# Altium PCB MK2.PcbDoc (part 7 of 7)
Units mil, origin at the board's own origin, x right, y up, seen from the top; angles counter-clockwise.
Board outline 3950 x 3965 mil, 2 copper layers (Top Layer, Bottom Layer); 19 components, 37 nets, 113 pads, 8 vias.
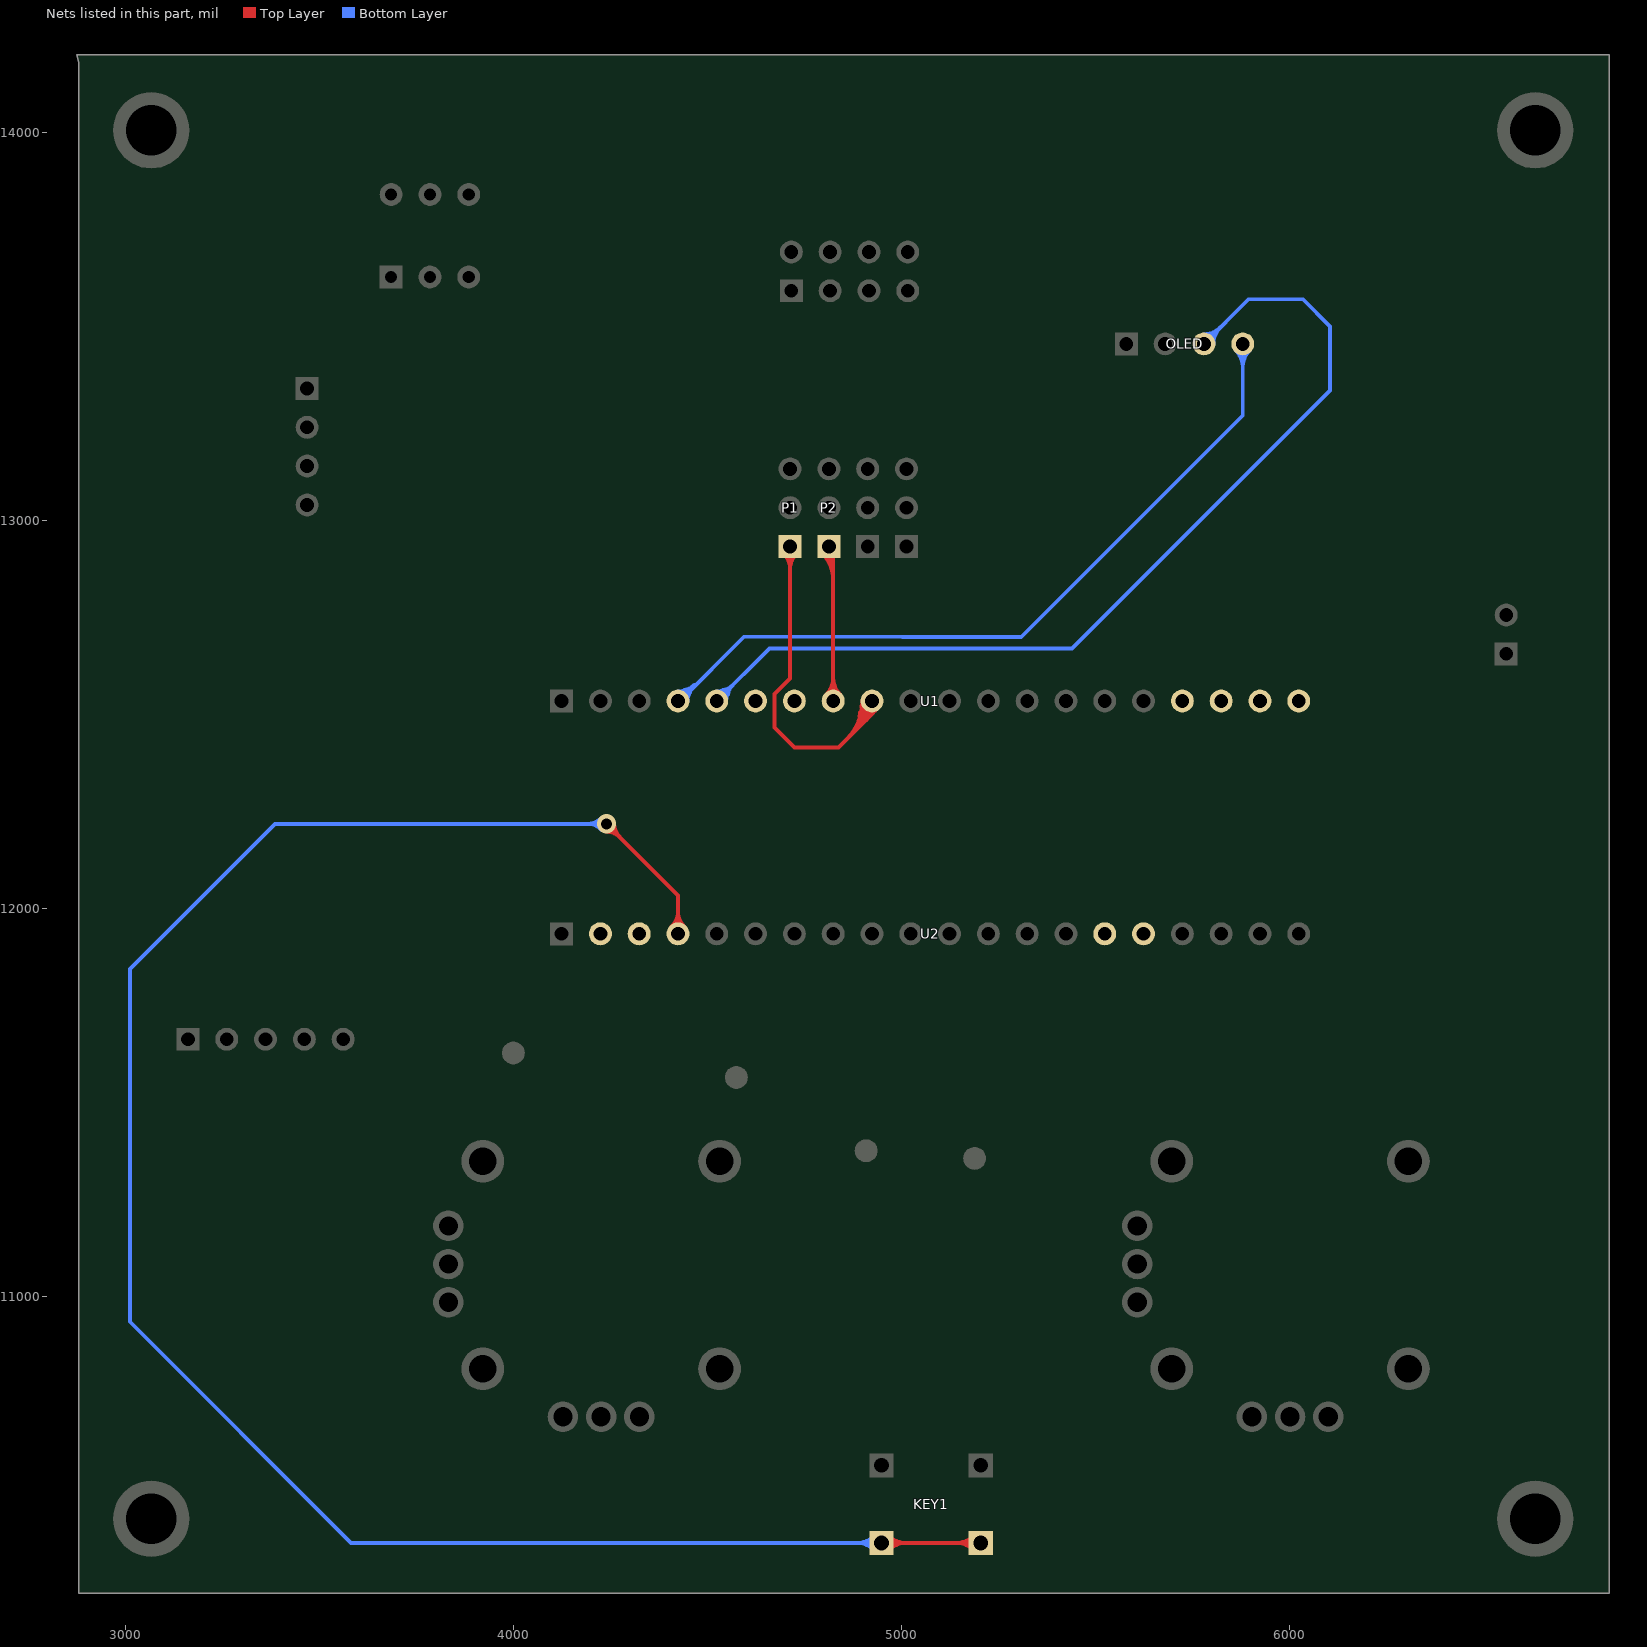
[diagram p7: the nets of this part, all layers, seen from the top]

## Via types
v1: diameter 50, hole 28, Top Layer to Bottom Layer, 8 vias

## Nets (pads, with @x,y where several pads share a name; then routed paths per layer and width w, separated by ;. In a path a pad name is that pad's centre, name@x,y a point inside that pad or via, vN(x,y) a via of type N, cw(c..) or ccw(c..) an arc to the next point about the centre after c; other vN are vias at no path point) (continued)
PB4: P1.1 U1.9 | length 13662.3
  Top Layer w10: P1.1@4713.43,12932.8 4713.43,12592.48 4673.27,12552.32 4673.27,12465.94 4724.45,12414.76 4838.62,12414.76 4924.45,12500.59 ; U1.9@4924.45,12534.45 4924.45,12500.59 ; P1.1@4696.08,12915.45 cw(c4654.21,12873.58) 4713.43,12873.58 ; P1.1@4696.08,12915.45 cw(c4654.21,12873.58) 4713.43,12873.58 ; P1.1@4696.08,12915.45 cw(c4654.21,12873.58) 4713.43,12873.58 ; P1.1@4696.08,12915.45 cw(c4654.21,12873.58) 4713.43,12873.58 ; P1.1@4696.08,12915.45 cw(c4654.21,12873.58) 4713.43,12873.58 ; P1.1@4696.08,12915.45 cw(c4654.21,12873.58) 4713.43,12873.58 ; P1.1@4703.15,12922.52 cw(c4678.35,12897.72) 4713.43,12897.72 ; P1.1@4703.15,12922.52 cw(c4678.35,12897.72) 4713.43,12897.72 ; P1.1@4703.15,12922.52 cw(c4678.35,12897.72) 4713.43,12897.72 ; P1.1@4703.15,12922.52 cw(c4678.35,12897.72) 4713.43,12897.72 ; P1.1@4703.15,12922.52 cw(c4678.35,12897.72) 4713.43,12897.72 ; P1.1@4703.15,12922.52 cw(c4678.35,12897.72) 4713.43,12897.72 ; 4713.43,12873.58 cw(c4772.64,12873.58) P1.1@4730.77,12915.45 ; 4713.43,12873.58 cw(c4772.64,12873.58) P1.1@4730.77,12915.45 ; 4713.43,12873.58 cw(c4772.64,12873.58) P1.1@4730.77,12915.45 ; 4713.43,12873.58 cw(c4772.64,12873.58) P1.1@4730.77,12915.45 ; 4713.43,12873.58 cw(c4772.64,12873.58) P1.1@4730.77,12915.45 ; 4713.43,12873.58 cw(c4772.64,12873.58) P1.1@4730.77,12915.45 ; 4713.43,12897.72 cw(c4748.5,12897.72) P1.1@4723.7,12922.52 ; 4713.43,12897.72 cw(c4748.5,12897.72) P1.1@4723.7,12922.52 ; 4713.43,12897.72 cw(c4748.5,12897.72) P1.1@4723.7,12922.52 ; 4713.43,12897.72 cw(c4748.5,12897.72) P1.1@4723.7,12922.52 ; 4713.43,12897.72 cw(c4748.5,12897.72) P1.1@4723.7,12922.52 ; 4713.43,12897.72 cw(c4748.5,12897.72) P1.1@4723.7,12922.52 ; 4858.64,12434.78 ccw(c4758.96,12534.45) U1.9@4899.92,12534.45 ; 4858.64,12434.78 ccw(c4758.96,12534.45) U1.9@4899.92,12534.45 ; 4858.64,12434.78 ccw(c4758.96,12534.45) U1.9@4899.92,12534.45 ; 4858.64,12434.78 ccw(c4758.96,12534.45) U1.9@4899.92,12534.45 ; 4858.64,12434.78 ccw(c4758.96,12534.45) U1.9@4899.92,12534.45 ; 4858.64,12434.78 ccw(c4758.96,12534.45) U1.9@4899.92,12534.45 ; 4875.71,12451.85 ccw(c4793.11,12534.45) U1.9@4909.92,12534.45 ; 4875.71,12451.85 ccw(c4793.11,12534.45) U1.9@4909.92,12534.45 ; 4875.71,12451.85 ccw(c4793.11,12534.45) U1.9@4909.92,12534.45 ; 4875.71,12451.85 ccw(c4793.11,12534.45) U1.9@4909.92,12534.45 ; 4875.71,12451.85 ccw(c4793.11,12534.45) U1.9@4909.92,12534.45 ; 4875.71,12451.85 ccw(c4793.11,12534.45) U1.9@4909.92,12534.45 ; 4886.45,12472.28 cw(c4977.12,12452.64) U1.9@4926.9,12530.64 ; 4886.45,12472.28 cw(c4977.12,12452.64) U1.9@4926.9,12530.64 ; 4886.45,12472.28 cw(c4977.12,12452.64) U1.9@4926.9,12530.64 ; 4886.45,12472.28 cw(c4977.12,12452.64) U1.9@4926.9,12530.64 ; 4886.45,12472.28 cw(c4977.12,12452.64) U1.9@4926.9,12530.64 ; 4886.45,12472.28 cw(c4977.12,12452.64) U1.9@4926.9,12530.64 ; 4886.45,12472.28 cw(c4977.12,12452.64) U1.9@4926.9,12530.64 ; 4886.45,12472.28 cw(c4977.12,12452.64) U1.9@4926.9,12530.64 ; 4886.45,12472.28 cw(c4977.12,12452.64) U1.9@4926.9,12530.64 ; 4886.45,12472.28 cw(c4977.12,12452.64) U1.9@4926.9,12530.64 ; 4886.45,12472.28 cw(c4977.12,12452.64) U1.9@4926.9,12530.64 ; 4886.45,12472.28 cw(c4977.12,12452.64) U1.9@4926.9,12530.64 ; 4886.45,12472.28 cw(c4977.12,12452.64) U1.9@4926.9,12530.64 ; 4886.45,12472.28 cw(c4977.12,12452.64) U1.9@4926.9,12530.64 ; 4886.45,12472.28 cw(c4977.12,12452.64) U1.9@4926.9,12530.64 ; 4891.56,12495.88 cw(c4958.64,12481.34) U1.9@4921.49,12539.05 ; 4891.56,12495.88 cw(c4958.64,12481.34) U1.9@4921.49,12539.05 ; 4891.56,12495.88 cw(c4958.64,12481.34) U1.9@4921.49,12539.05 ; 4891.56,12495.88 cw(c4958.64,12481.34) U1.9@4921.49,12539.05 ; 4891.56,12495.88 cw(c4958.64,12481.34) U1.9@4921.49,12539.05 ; 4891.56,12495.88 cw(c4958.64,12481.34) U1.9@4921.49,12539.05 ; 4891.56,12495.88 cw(c4958.64,12481.34) U1.9@4921.49,12539.05 ; 4891.56,12495.88 cw(c4958.64,12481.34) U1.9@4921.49,12539.05 ; 4891.56,12495.88 cw(c4958.64,12481.34) U1.9@4921.49,12539.05 ; 4891.56,12495.88 cw(c4958.64,12481.34) U1.9@4921.49,12539.05 ; 4891.56,12495.88 cw(c4958.64,12481.34) U1.9@4921.49,12539.05 ; 4891.56,12495.88 cw(c4958.64,12481.34) U1.9@4921.49,12539.05 ; 4891.56,12495.88 cw(c4958.64,12481.34) U1.9@4921.49,12539.05 ; 4891.56,12495.88 cw(c4958.64,12481.34) U1.9@4921.49,12539.05 ; 4891.56,12495.88 cw(c4958.64,12481.34) U1.9@4921.49,12539.05 ; 4892.78,12468.92 ccw(c4827.25,12534.45) U1.9@4919.92,12534.45 ; 4892.78,12468.92 ccw(c4827.25,12534.45) U1.9@4919.92,12534.45 ; 4892.78,12468.92 ccw(c4827.25,12534.45) U1.9@4919.92,12534.45 ; 4892.78,12468.92 ccw(c4827.25,12534.45) U1.9@4919.92,12534.45 ; 4892.78,12468.92 ccw(c4827.25,12534.45) U1.9@4919.92,12534.45 ; 4892.78,12468.92 ccw(c4827.25,12534.45) U1.9@4919.92,12534.45 ; 4894.17,12474.91 cw(c4966.08,12455.88) U1.9@4931.25,12521.61 ; 4894.17,12474.91 cw(c4966.08,12455.88) U1.9@4931.25,12521.61 ; 4894.17,12474.91 cw(c4966.08,12455.88) U1.9@4931.25,12521.61 ; 4894.17,12474.91 cw(c4966.08,12455.88) U1.9@4931.25,12521.61 ; 4894.17,12474.91 cw(c4966.08,12455.88) U1.9@4931.25,12521.61 ; 4894.17,12474.91 cw(c4966.08,12455.88) U1.9@4931.25,12521.61 ; 4894.17,12474.91 cw(c4966.08,12455.88) U1.9@4931.25,12521.61 ; 4894.17,12474.91 cw(c4966.08,12455.88) U1.9@4931.25,12521.61 ; 4894.17,12474.91 cw(c4966.08,12455.88) U1.9@4931.25,12521.61 ; 4894.17,12474.91 cw(c4966.08,12455.88) U1.9@4931.25,12521.61 ; 4894.17,12474.91 cw(c4966.08,12455.88) U1.9@4931.25,12521.61 ; 4894.17,12474.91 cw(c4966.08,12455.88) U1.9@4931.25,12521.61 ; 4894.17,12474.91 cw(c4966.08,12455.88) U1.9@4931.25,12521.61 ; 4894.17,12474.91 cw(c4966.08,12455.88) U1.9@4931.25,12521.61 ; 4894.17,12474.91 cw(c4966.08,12455.88) U1.9@4931.25,12521.61 ; 4894.91,12495.4 ccw(c4871.91,12516.28) U1.9@4901.27,12526.43 ; 4894.91,12495.4 ccw(c4871.91,12516.28) U1.9@4901.27,12526.43 ; 4894.91,12495.4 ccw(c4871.91,12516.28) U1.9@4901.27,12526.43 ; 4894.91,12495.4 ccw(c4871.91,12516.28) U1.9@4901.27,12526.43 ; 4894.91,12495.4 ccw(c4871.91,12516.28) U1.9@4901.27,12526.43 ; 4894.91,12495.4 ccw(c4871.91,12516.28) U1.9@4901.27,12526.43 ; 4894.91,12495.4 ccw(c4871.91,12516.28) U1.9@4901.27,12526.43 ; 4894.91,12495.4 ccw(c4871.91,12516.28) U1.9@4901.27,12526.43 ; 4894.91,12495.4 ccw(c4871.91,12516.28) U1.9@4901.27,12526.43 ; 4894.91,12495.4 ccw(c4871.91,12516.28) U1.9@4901.27,12526.43 ; 4894.91,12495.4 ccw(c4871.91,12516.28) U1.9@4901.27,12526.43 ; 4894.91,12495.4 ccw(c4871.91,12516.28) U1.9@4901.27,12526.43 ; 4894.91,12495.4 ccw(c4871.91,12516.28) U1.9@4901.27,12526.43 ; 4894.91,12495.4 ccw(c4871.91,12516.28) U1.9@4901.27,12526.43 ; 4894.91,12495.4 ccw(c4871.91,12516.28) U1.9@4901.27,12526.43 ; 4894.91,12495.4 ccw(c4871.91,12516.28) U1.9@4901.27,12526.43 ; 4894.91,12495.4 ccw(c4871.91,12516.28) U1.9@4901.27,12526.43 ; 4894.91,12495.4 ccw(c4871.91,12516.28) U1.9@4901.27,12526.43 ; 4894.91,12495.4 ccw(c4871.91,12516.28) U1.9@4901.27,12526.43 ; 4894.91,12495.4 ccw(c4871.91,12516.28) U1.9@4901.27,12526.43 ; 4894.99,12495.48 cw(c4927.78,12465.72) U1.9@4925.64,12509.95 ; 4894.99,12495.48 cw(c4927.78,12465.72) U1.9@4925.64,12509.95 ; 4894.99,12495.48 cw(c4927.78,12465.72) U1.9@4925.64,12509.95 ; 4894.99,12495.48 cw(c4927.78,12465.72) U1.9@4925.64,12509.95 ; 4894.99,12495.48 cw(c4927.78,12465.72) U1.9@4925.64,12509.95 ; 4894.99,12495.48 cw(c4927.78,12465.72) U1.9@4925.64,12509.95 ; 4894.99,12495.48 cw(c4927.78,12465.72) U1.9@4925.64,12509.95 ; 4894.99,12495.48 cw(c4927.78,12465.72) U1.9@4925.64,12509.95 ; 4894.99,12495.48 cw(c4927.78,12465.72) U1.9@4925.64,12509.95 ; 4894.99,12495.48 cw(c4927.78,12465.72) U1.9@4925.64,12509.95 ; 4894.99,12495.48 cw(c4927.78,12465.72) U1.9@4925.64,12509.95 ; 4894.99,12495.48 cw(c4927.78,12465.72) U1.9@4925.64,12509.95 ; 4894.99,12495.48 cw(c4927.78,12465.72) U1.9@4925.64,12509.95 ; 4894.99,12495.48 cw(c4927.78,12465.72) U1.9@4925.64,12509.95 ; 4894.99,12495.48 cw(c4927.78,12465.72) U1.9@4925.64,12509.95 ; 4894.99,12495.48 cw(c4927.78,12465.72) U1.9@4925.64,12509.95 ; 4894.99,12495.48 cw(c4927.78,12465.72) U1.9@4925.64,12509.95 ; 4894.99,12495.48 cw(c4927.78,12465.72) U1.9@4925.64,12509.95 ; 4894.99,12495.48 cw(c4927.78,12465.72) U1.9@4925.64,12509.95 ; 4894.99,12495.48 cw(c4927.78,12465.72) U1.9@4925.64,12509.95 ; 4896.68,12519.47 cw(c4940.16,12510.05) U1.9@4916.07,12547.46 ; 4896.68,12519.47 cw(c4940.16,12510.05) U1.9@4916.07,12547.46 ; 4896.68,12519.47 cw(c4940.16,12510.05) U1.9@4916.07,12547.46 ; 4896.68,12519.47 cw(c4940.16,12510.05) U1.9@4916.07,12547.46 ; 4896.68,12519.47 cw(c4940.16,12510.05) U1.9@4916.07,12547.46 ; 4896.68,12519.47 cw(c4940.16,12510.05) U1.9@4916.07,12547.46 ; 4896.68,12519.47 cw(c4940.16,12510.05) U1.9@4916.07,12547.46 ; 4896.68,12519.47 cw(c4940.16,12510.05) U1.9@4916.07,12547.46 ; 4896.68,12519.47 cw(c4940.16,12510.05) U1.9@4916.07,12547.46 ; 4896.68,12519.47 cw(c4940.16,12510.05) U1.9@4916.07,12547.46 ; 4896.68,12519.47 cw(c4940.16,12510.05) U1.9@4916.07,12547.46 ; 4896.68,12519.47 cw(c4940.16,12510.05) U1.9@4916.07,12547.46 ; 4896.68,12519.47 cw(c4940.16,12510.05) U1.9@4916.07,12547.46 ; 4896.68,12519.47 cw(c4940.16,12510.05) U1.9@4916.07,12547.46 ; 4896.68,12519.47 cw(c4940.16,12510.05) U1.9@4916.07,12547.46 ; 4897.27,12512.36 cw(c4905.03,12505.32) U1.9@4910.84,12514.04 ; 4897.27,12512.36 ccw(c4885.24,12523.28) U1.9@4900.86,12527.73 ; 4897.27,12512.36 cw(c4905.03,12505.32) U1.9@4910.84,12514.04 ; 4897.27,12512.36 ccw(c4885.24,12523.28) U1.9@4900.86,12527.73 ; 4897.27,12512.36 cw(c4905.03,12505.32) U1.9@4910.84,12514.04 ; 4897.27,12512.36 ccw(c4885.24,12523.28) U1.9@4900.86,12527.73 ; 4897.27,12512.36 cw(c4905.03,12505.32) U1.9@4910.84,12514.04 ; 4897.27,12512.36 ccw(c4885.24,12523.28) U1.9@4900.86,12527.73 ; 4897.27,12512.36 cw(c4905.03,12505.32) U1.9@4910.84,12514.04 ; 4897.27,12512.36 ccw(c4885.24,12523.28) U1.9@4900.86,12527.73 ; 4897.27,12512.36 cw(c4905.03,12505.32) U1.9@4910.84,12514.04 ; 4897.27,12512.36 ccw(c4885.24,12523.28) U1.9@4900.86,12527.73 ; 4897.27,12512.36 cw(c4905.03,12505.32) U1.9@4910.84,12514.04 ; 4897.27,12512.36 ccw(c4885.24,12523.28) U1.9@4900.86,12527.73 ; 4897.27,12512.36 cw(c4905.03,12505.32) U1.9@4910.84,12514.04 ; 4897.27,12512.36 ccw(c4885.24,12523.28) U1.9@4900.86,12527.73 ; 4897.27,12512.36 cw(c4905.03,12505.32) U1.9@4910.84,12514.04 ; 4897.27,12512.36 ccw(c4885.24,12523.28) U1.9@4900.86,12527.73 ; 4897.27,12512.36 cw(c4905.03,12505.32) U1.9@4910.84,12514.04 ; 4897.27,12512.36 ccw(c4885.24,12523.28) U1.9@4900.86,12527.73 ; 4897.27,12512.36 ccw(c4885.24,12523.28) U1.9@4900.86,12527.73 ; 4897.27,12512.36 cw(c4905.03,12505.32) U1.9@4910.84,12514.04 ; 4897.27,12512.36 ccw(c4885.24,12523.28) U1.9@4900.86,12527.73 ; 4897.27,12512.36 cw(c4905.03,12505.32) U1.9@4910.84,12514.04 ; 4897.27,12512.36 ccw(c4885.24,12523.28) U1.9@4900.86,12527.73 ; 4897.27,12512.36 cw(c4905.03,12505.32) U1.9@4910.84,12514.04 ; 4897.27,12512.36 ccw(c4885.24,12523.28) U1.9@4900.86,12527.73 ; 4897.27,12512.36 cw(c4905.03,12505.32) U1.9@4910.84,12514.04 ; 4897.27,12512.36 ccw(c4885.24,12523.28) U1.9@4900.86,12527.73 ; 4897.27,12512.36 cw(c4905.03,12505.32) U1.9@4910.84,12514.04 ; 4897.27,12512.36 ccw(c4885.24,12523.28) U1.9@4900.86,12527.73 ; 4897.27,12512.36 cw(c4905.03,12505.32) U1.9@4910.84,12514.04 ; 4897.27,12512.36 ccw(c4885.24,12523.28) U1.9@4900.86,12527.73 ; 4897.27,12512.36 cw(c4905.03,12505.32) U1.9@4910.84,12514.04 ; 4897.27,12512.36 ccw(c4885.24,12523.28) U1.9@4900.86,12527.73 ; 4897.27,12512.36 cw(c4905.03,12505.32) U1.9@4910.84,12514.04 ; 4897.27,12512.36 ccw(c4885.24,12523.28) U1.9@4900.86,12527.73 ; 4897.27,12512.36 cw(c4905.03,12505.32) U1.9@4910.84,12514.04 ; 4897.27,12512.36 ccw(c4885.24,12523.28) U1.9@4900.86,12527.73 ; 4897.27,12512.36 cw(c4905.03,12505.32) U1.9@4910.84,12514.04 ; 4900.01,12497.01 cw(c4951.51,12483.38) U1.9@4926.57,12530.45 ; 4900.01,12497.01 cw(c4951.51,12483.38) U1.9@4926.57,12530.45 ; 4900.01,12497.01 cw(c4951.51,12483.38) U1.9@4926.57,12530.45 ; 4900.01,12497.01 cw(c4951.51,12483.38) U1.9@4926.57,12530.45 ; 4900.01,12497.01 cw(c4951.51,12483.38) U1.9@4926.57,12530.45 ; 4900.01,12497.01 cw(c4951.51,12483.38) U1.9@4926.57,12530.45 ; 4900.01,12497.01 cw(c4951.51,12483.38) U1.9@4926.57,12530.45 ; 4900.01,12497.01 cw(c4951.51,12483.38) U1.9@4926.57,12530.45 ; 4900.01,12497.01 cw(c4951.51,12483.38) U1.9@4926.57,12530.45 ; 4900.01,12497.01 cw(c4951.51,12483.38) U1.9@4926.57,12530.45 ; 4900.01,12497.01 cw(c4951.51,12483.38) U1.9@4926.57,12530.45 ; 4900.01,12497.01 cw(c4951.51,12483.38) U1.9@4926.57,12530.45 ; 4900.01,12497.01 cw(c4951.51,12483.38) U1.9@4926.57,12530.45 ; 4900.01,12497.01 cw(c4951.51,12483.38) U1.9@4926.57,12530.45 ; 4900.01,12497.01 cw(c4951.51,12483.38) U1.9@4926.57,12530.45 ; 4902.23,12512.97 cw(c4945.65,12516.07) U1.9@4912.76,12544.58 ; 4902.23,12512.97 cw(c4945.65,12516.07) U1.9@4912.76,12544.58 ; 4902.23,12512.97 cw(c4945.65,12516.07) U1.9@4912.76,12544.58 ; 4902.23,12512.97 cw(c4945.65,12516.07) U1.9@4912.76,12544.58 ; 4902.23,12512.97 cw(c4945.65,12516.07) U1.9@4912.76,12544.58 ; 4902.23,12512.97 cw(c4945.65,12516.07) U1.9@4912.76,12544.58 ; 4902.23,12512.97 cw(c4945.65,12516.07) U1.9@4912.76,12544.58 ; 4902.23,12512.97 cw(c4945.65,12516.07) U1.9@4912.76,12544.58 ; 4902.23,12512.97 cw(c4945.65,12516.07) U1.9@4912.76,12544.58 ; 4902.23,12512.97 cw(c4945.65,12516.07) U1.9@4912.76,12544.58 ; 4902.23,12512.97 cw(c4945.65,12516.07) U1.9@4912.76,12544.58 ; 4902.23,12512.97 cw(c4945.65,12516.07) U1.9@4912.76,12544.58 ; 4902.23,12512.97 cw(c4945.65,12516.07) U1.9@4912.76,12544.58 ; 4902.23,12512.97 cw(c4945.65,12516.07) U1.9@4912.76,12544.58 ; 4902.23,12512.97 cw(c4945.65,12516.07) U1.9@4912.76,12544.58 ; 4902.3,12494.7 ccw(c4889.33,12508.65) U1.9@4904.68,12519.93 ; 4902.3,12494.7 ccw(c4889.33,12508.65) U1.9@4904.68,12519.93 ; 4902.3,12494.7 ccw(c4889.33,12508.65) U1.9@4904.68,12519.93 ; 4902.3,12494.7 ccw(c4889.33,12508.65) U1.9@4904.68,12519.93 ; 4902.3,12494.7 ccw(c4889.33,12508.65) U1.9@4904.68,12519.93 ; 4902.3,12494.7 ccw(c4889.33,12508.65) U1.9@4904.68,12519.93 ; 4902.3,12494.7 ccw(c4889.33,12508.65) U1.9@4904.68,12519.93 ; 4902.3,12494.7 ccw(c4889.33,12508.65) U1.9@4904.68,12519.93 ; 4902.3,12494.7 ccw(c4889.33,12508.65) U1.9@4904.68,12519.93 ; 4902.3,12494.7 ccw(c4889.33,12508.65) U1.9@4904.68,12519.93 ; 4902.3,12494.7 ccw(c4889.33,12508.65) U1.9@4904.68,12519.93 ; 4902.3,12494.7 ccw(c4889.33,12508.65) U1.9@4904.68,12519.93 ; 4902.3,12494.7 ccw(c4889.33,12508.65) U1.9@4904.68,12519.93 ; 4902.3,12494.7 ccw(c4889.33,12508.65) U1.9@4904.68,12519.93 ; 4902.3,12494.7 ccw(c4889.33,12508.65) U1.9@4904.68,12519.93 ; 4902.3,12494.7 ccw(c4889.33,12508.65) U1.9@4904.68,12519.93 ; 4902.3,12494.7 ccw(c4889.33,12508.65) U1.9@4904.68,12519.93 ; 4902.3,12494.7 ccw(c4889.33,12508.65) U1.9@4904.68,12519.93 ; 4902.3,12494.7 ccw(c4889.33,12508.65) U1.9@4904.68,12519.93 ; 4902.3,12494.7 ccw(c4889.33,12508.65) U1.9@4904.68,12519.93 ; U1.9@4903.21,12522.19 cw(c4864.86,12500.04) 4907.63,12488.58 ; U1.9@4903.21,12522.19 cw(c4864.86,12500.04) 4907.63,12488.58 ; U1.9@4903.21,12522.19 cw(c4864.86,12500.04) 4907.63,12488.58 ; U1.9@4903.21,12522.19 cw(c4864.86,12500.04) 4907.63,12488.58 ; U1.9@4903.21,12522.19 cw(c4864.86,12500.04) 4907.63,12488.58 ; U1.9@4903.21,12522.19 cw(c4864.86,12500.04) 4907.63,12488.58 ; U1.9@4903.21,12522.19 cw(c4864.86,12500.04) 4907.63,12488.58 ; U1.9@4903.21,12522.19 cw(c4864.86,12500.04) 4907.63,12488.58 ; U1.9@4903.21,12522.19 cw(c4864.86,12500.04) 4907.63,12488.58 ; U1.9@4903.21,12522.19 cw(c4864.86,12500.04) 4907.63,12488.58 ; U1.9@4903.21,12522.19 cw(c4864.86,12500.04) 4907.63,12488.58 ; U1.9@4903.21,12522.19 cw(c4864.86,12500.04) 4907.63,12488.58 ; U1.9@4903.21,12522.19 cw(c4864.86,12500.04) 4907.63,12488.58 ; U1.9@4903.21,12522.19 cw(c4864.86,12500.04) 4907.63,12488.58 ; U1.9@4903.21,12522.19 cw(c4864.86,12500.04) 4907.63,12488.58 ; 4906.25,12507.89 ccw(c4890.09,12522.56) U1.9@4910.72,12529.7 ; 4906.25,12507.89 ccw(c4890.09,12522.56) U1.9@4910.72,12529.7 ; 4906.25,12507.89 ccw(c4890.09,12522.56) U1.9@4910.72,12529.7 ; 4906.25,12507.89 ccw(c4890.09,12522.56) U1.9@4910.72,12529.7 ; 4906.25,12507.89 ccw(c4890.09,12522.56) U1.9@4910.72,12529.7 ; 4906.25,12507.89 ccw(c4890.09,12522.56) U1.9@4910.72,12529.7 ; 4906.25,12507.89 ccw(c4890.09,12522.56) U1.9@4910.72,12529.7 ; 4906.25,12507.89 ccw(c4890.09,12522.56) U1.9@4910.72,12529.7 ; 4906.25,12507.89 ccw(c4890.09,12522.56) U1.9@4910.72,12529.7 ; 4906.25,12507.89 ccw(c4890.09,12522.56) U1.9@4910.72,12529.7 ; 4906.25,12507.89 ccw(c4890.09,12522.56) U1.9@4910.72,12529.7 ; 4906.25,12507.89 ccw(c4890.09,12522.56) U1.9@4910.72,12529.7 ; 4906.25,12507.89 ccw(c4890.09,12522.56) U1.9@4910.72,12529.7 ; 4906.25,12507.89 ccw(c4890.09,12522.56) U1.9@4910.72,12529.7 ; 4906.25,12507.89 ccw(c4890.09,12522.56) U1.9@4910.72,12529.7 ; 4906.25,12507.89 ccw(c4890.09,12522.56) U1.9@4910.72,12529.7 ; 4906.25,12507.89 ccw(c4890.09,12522.56) U1.9@4910.72,12529.7 ; 4906.25,12507.89 ccw(c4890.09,12522.56) U1.9@4910.72,12529.7 ; 4906.25,12507.89 ccw(c4890.09,12522.56) U1.9@4910.72,12529.7 ; 4906.25,12507.89 ccw(c4890.09,12522.56) U1.9@4910.72,12529.7 ; 4909.22,12504.69 ccw(c4900.11,12533.11) U1.9@4929.91,12534.75 ; 4909.22,12504.69 ccw(c4900.11,12533.11) U1.9@4929.91,12534.75 ; 4909.22,12504.69 ccw(c4900.11,12533.11) U1.9@4929.91,12534.75 ; 4909.22,12504.69 ccw(c4900.11,12533.11) U1.9@4929.91,12534.75 ; 4909.22,12504.69 ccw(c4900.11,12533.11) U1.9@4929.91,12534.75 ; 4909.22,12504.69 ccw(c4900.11,12533.11) U1.9@4929.91,12534.75 ; 4909.22,12504.69 ccw(c4900.11,12533.11) U1.9@4929.91,12534.75 ; 4909.22,12504.69 ccw(c4900.11,12533.11) U1.9@4929.91,12534.75 ; 4909.22,12504.69 ccw(c4900.11,12533.11) U1.9@4929.91,12534.75 ; 4909.22,12504.69 ccw(c4900.11,12533.11) U1.9@4929.91,12534.75 ; 4909.22,12504.69 ccw(c4900.11,12533.11) U1.9@4929.91,12534.75 ; 4909.22,12504.69 ccw(c4900.11,12533.11) U1.9@4929.91,12534.75 ; 4909.22,12504.69 ccw(c4900.11,12533.11) U1.9@4929.91,12534.75 ; 4909.22,12504.69 ccw(c4900.11,12533.11) U1.9@4929.91,12534.75 ; 4909.22,12504.69 ccw(c4900.11,12533.11) U1.9@4929.91,12534.75 ; 4909.85,12485.99 ccw(c4861.39,12534.45) U1.9@4929.92,12534.45 ; 4909.85,12485.99 ccw(c4861.39,12534.45) U1.9@4929.92,12534.45 ; 4909.85,12485.99 ccw(c4861.39,12534.45) U1.9@4929.92,12534.45 ; 4909.85,12485.99 ccw(c4861.39,12534.45) U1.9@4929.92,12534.45 ; 4909.85,12485.99 ccw(c4861.39,12534.45) U1.9@4929.92,12534.45 ; 4909.85,12485.99 ccw(c4861.39,12534.45) U1.9@4929.92,12534.45 ; 4910.52,12502.34 ccw(c4898.44,12515.34) U1.9@4912.74,12525.85 ; 4910.52,12502.34 ccw(c4898.44,12515.34) U1.9@4912.74,12525.85 ; 4910.52,12502.34 ccw(c4898.44,12515.34) U1.9@4912.74,12525.85 ; 4910.52,12502.34 ccw(c4898.44,12515.34) U1.9@4912.74,12525.85 ; 4910.52,12502.34 ccw(c4898.44,12515.34) U1.9@4912.74,12525.85 ; 4910.52,12502.34 ccw(c4898.44,12515.34) U1.9@4912.74,12525.85 ; 4910.52,12502.34 ccw(c4898.44,12515.34) U1.9@4912.74,12525.85 ; 4910.52,12502.34 ccw(c4898.44,12515.34) U1.9@4912.74,12525.85 ; 4910.52,12502.34 ccw(c4898.44,12515.34) U1.9@4912.74,12525.85 ; 4910.52,12502.34 ccw(c4898.44,12515.34) U1.9@4912.74,12525.85 ; 4910.52,12502.34 ccw(c4898.44,12515.34) U1.9@4912.74,12525.85 ; 4910.52,12502.34 ccw(c4898.44,12515.34) U1.9@4912.74,12525.85 ; 4910.52,12502.34 ccw(c4898.44,12515.34) U1.9@4912.74,12525.85 ; 4910.52,12502.34 ccw(c4898.44,12515.34) U1.9@4912.74,12525.85 ; 4910.52,12502.34 ccw(c4898.44,12515.34) U1.9@4912.74,12525.85 ; 4910.52,12502.34 ccw(c4898.44,12515.34) U1.9@4912.74,12525.85 ; 4910.52,12502.34 ccw(c4898.44,12515.34) U1.9@4912.74,12525.85 ; 4910.52,12502.34 ccw(c4898.44,12515.34) U1.9@4912.74,12525.85 ; 4910.52,12502.34 ccw(c4898.44,12515.34) U1.9@4912.74,12525.85 ; 4910.52,12502.34 ccw(c4898.44,12515.34) U1.9@4912.74,12525.85 ; 4910.62,12499.75 cw(c4940.87,12491.65) U1.9@4929.65,12520.89 ; 4910.62,12499.75 cw(c4940.87,12491.65) U1.9@4929.65,12520.89 ; 4910.62,12499.75 cw(c4940.87,12491.65) U1.9@4929.65,12520.89 ; 4910.62,12499.75 cw(c4940.87,12491.65) U1.9@4929.65,12520.89 ; 4910.62,12499.75 cw(c4940.87,12491.65) U1.9@4929.65,12520.89 ; 4910.62,12499.75 cw(c4940.87,12491.65) U1.9@4929.65,12520.89 ; 4910.62,12499.75 cw(c4940.87,12491.65) U1.9@4929.65,12520.89 ; 4910.62,12499.75 cw(c4940.87,12491.65) U1.9@4929.65,12520.89 ; 4910.62,12499.75 cw(c4940.87,12491.65) U1.9@4929.65,12520.89 ; 4910.62,12499.75 cw(c4940.87,12491.65) U1.9@4929.65,12520.89 ; 4910.62,12499.75 cw(c4940.87,12491.65) U1.9@4929.65,12520.89 ; 4910.62,12499.75 cw(c4940.87,12491.65) U1.9@4929.65,12520.89 ; 4910.62,12499.75 cw(c4940.87,12491.65) U1.9@4929.65,12520.89 ; 4910.62,12499.75 cw(c4940.87,12491.65) U1.9@4929.65,12520.89 ; 4910.62,12499.75 cw(c4940.87,12491.65) U1.9@4929.65,12520.89 ; U1.9@4916.8,12511.14 cw(c4913.34,12500.59) 4924.45,12500.59 ; U1.9@4916.8,12511.14 cw(c4913.34,12500.59) 4924.45,12500.59 ; U1.9@4916.8,12511.14 cw(c4913.34,12500.59) 4924.45,12500.59 ; U1.9@4916.8,12511.14 cw(c4913.34,12500.59) 4924.45,12500.59 ; U1.9@4916.8,12511.14 cw(c4913.34,12500.59) 4924.45,12500.59 ; U1.9@4916.8,12511.14 cw(c4913.34,12500.59) 4924.45,12500.59 ; 4924.45,12500.59 cw(c4935.55,12500.59) U1.9@4932.09,12511.14 ; 4924.45,12500.59 cw(c4935.55,12500.59) U1.9@4932.09,12511.14 ; 4924.45,12500.59 cw(c4935.55,12500.59) U1.9@4932.09,12511.14 ; 4924.45,12500.59 cw(c4935.55,12500.59) U1.9@4932.09,12511.14 ; 4924.45,12500.59 cw(c4935.55,12500.59) U1.9@4932.09,12511.14 ; 4924.45,12500.59 cw(c4935.55,12500.59) U1.9@4932.09,12511.14 ; 4926.92,12503.06 ccw(c4895.53,12534.45) U1.9@4939.92,12534.45 ; 4926.92,12503.06 ccw(c4895.53,12534.45) U1.9@4939.92,12534.45 ; 4926.92,12503.06 ccw(c4895.53,12534.45) U1.9@4939.92,12534.45 ; 4926.92,12503.06 ccw(c4895.53,12534.45) U1.9@4939.92,12534.45 ; 4926.92,12503.06 ccw(c4895.53,12534.45) U1.9@4939.92,12534.45 ; 4926.92,12503.06 ccw(c4895.53,12534.45) U1.9@4939.92,12534.45
PB5: P2.1 U1.8 | length 2421.1
  Top Layer w10: P2.1@4813.43,12932.8 4824.45,12921.77 U1.8@4824.45,12534.45 ; P2.1@4796.08,12915.45 cw(c4727.6,12846.97) 4824.45,12846.97 ; P2.1@4796.08,12915.45 cw(c4727.6,12846.97) 4824.45,12846.97 ; P2.1@4796.08,12915.45 cw(c4727.6,12846.97) 4824.45,12846.97 ; P2.1@4796.08,12915.45 cw(c4727.6,12846.97) 4824.45,12846.97 ; P2.1@4796.08,12915.45 cw(c4727.6,12846.97) 4824.45,12846.97 ; P2.1@4796.08,12915.45 cw(c4727.6,12846.97) 4824.45,12846.97 ; P2.1@4803.15,12922.52 cw(c4751.74,12871.11) 4824.45,12871.11 ; P2.1@4803.15,12922.52 cw(c4751.74,12871.11) 4824.45,12871.11 ; P2.1@4803.15,12922.52 cw(c4751.74,12871.11) 4824.45,12871.11 ; P2.1@4803.15,12922.52 cw(c4751.74,12871.11) 4824.45,12871.11 ; P2.1@4803.15,12922.52 cw(c4751.74,12871.11) 4824.45,12871.11 ; P2.1@4803.15,12922.52 cw(c4751.74,12871.11) 4824.45,12871.11 ; U1.8@4807.11,12551.79 ccw(c4765.23,12593.66) 4824.45,12593.66 ; U1.8@4807.11,12551.79 ccw(c4765.23,12593.66) 4824.45,12593.66 ; U1.8@4807.11,12551.79 ccw(c4765.23,12593.66) 4824.45,12593.66 ; U1.8@4807.11,12551.79 ccw(c4765.23,12593.66) 4824.45,12593.66 ; U1.8@4807.11,12551.79 ccw(c4765.23,12593.66) 4824.45,12593.66 ; U1.8@4807.11,12551.79 ccw(c4765.23,12593.66) 4824.45,12593.66 ; P2.1@4810.22,12929.59 cw(c4775.88,12895.25) 4824.45,12895.25 ; P2.1@4810.22,12929.59 cw(c4775.88,12895.25) 4824.45,12895.25 ; P2.1@4810.22,12929.59 cw(c4775.88,12895.25) 4824.45,12895.25 ; P2.1@4810.22,12929.59 cw(c4775.88,12895.25) 4824.45,12895.25 ; P2.1@4810.22,12929.59 cw(c4775.88,12895.25) 4824.45,12895.25 ; P2.1@4810.22,12929.59 cw(c4775.88,12895.25) 4824.45,12895.25 ; U1.8@4814.18,12544.72 ccw(c4789.38,12569.52) 4824.45,12569.52 ; U1.8@4814.18,12544.72 ccw(c4789.38,12569.52) 4824.45,12569.52 ; U1.8@4814.18,12544.72 ccw(c4789.38,12569.52) 4824.45,12569.52 ; U1.8@4814.18,12544.72 ccw(c4789.38,12569.52) 4824.45,12569.52 ; U1.8@4814.18,12544.72 ccw(c4789.38,12569.52) 4824.45,12569.52 ; U1.8@4814.18,12544.72 ccw(c4789.38,12569.52) 4824.45,12569.52 ; 4824.45,12569.52 ccw(c4859.52,12569.52) U1.8@4834.72,12544.72 ; 4824.45,12569.52 ccw(c4859.52,12569.52) U1.8@4834.72,12544.72 ; 4824.45,12569.52 ccw(c4859.52,12569.52) U1.8@4834.72,12544.72 ; 4824.45,12569.52 ccw(c4859.52,12569.52) U1.8@4834.72,12544.72 ; 4824.45,12569.52 ccw(c4859.52,12569.52) U1.8@4834.72,12544.72 ; 4824.45,12569.52 ccw(c4859.52,12569.52) U1.8@4834.72,12544.72 ; 4824.45,12593.66 ccw(c4883.66,12593.66) U1.8@4841.79,12551.79 ; 4824.45,12593.66 ccw(c4883.66,12593.66) U1.8@4841.79,12551.79 ; 4824.45,12593.66 ccw(c4883.66,12593.66) U1.8@4841.79,12551.79 ; 4824.45,12593.66 ccw(c4883.66,12593.66) U1.8@4841.79,12551.79 ; 4824.45,12593.66 ccw(c4883.66,12593.66) U1.8@4841.79,12551.79 ; 4824.45,12593.66 ccw(c4883.66,12593.66) U1.8@4841.79,12551.79 ; 4824.45,12900.19 cw(c4846.03,12900.19) P2.1@4830.77,12915.45 ; 4824.45,12900.19 cw(c4846.03,12900.19) P2.1@4830.77,12915.45 ; 4824.45,12900.19 cw(c4846.03,12900.19) P2.1@4830.77,12915.45 ; 4824.45,12900.19 cw(c4846.03,12900.19) P2.1@4830.77,12915.45 ; 4824.45,12900.19 cw(c4846.03,12900.19) P2.1@4830.77,12915.45 ; 4824.45,12900.19 cw(c4846.03,12900.19) P2.1@4830.77,12915.45
PB6: U1.7
PB7: U1.6
PB8: OLED.3 U1.5 | length 4792.1
  Bottom Layer w10: U1.5@4524.45,12534.45 4660,12670 5440,12670 6105,13335 6105,13500 6035,13570 5895,13570 OLED.3@5780,13455 ; OLED.3@5780,13469.53 ccw(c5780,13504.6) 5804.8,13479.8 ccw(c5829.6,13455) OLED.3@5794.53,13455 ; OLED.3@5780,13479.53 ccw(c5780,13538.74) 5821.87,13496.87 ccw(c5863.74,13455) OLED.3@5804.53,13455 ; U1.5@4519.09,12535.55 cw(c4556.74,12527.84) 4546.8,12564.96 ; U1.5@4519.09,12535.55 cw(c4556.74,12527.84) 4546.8,12564.96 ; U1.5@4519.09,12535.55 cw(c4556.74,12527.84) 4546.8,12564.96 ; U1.5@4519.09,12535.55 cw(c4556.74,12527.84) 4546.8,12564.96 ; U1.5@4519.09,12535.55 cw(c4556.74,12527.84) 4546.8,12564.96 ; U1.5@4519.09,12535.55 cw(c4556.74,12527.84) 4546.8,12564.96 ; U1.5@4519.09,12535.55 cw(c4556.74,12527.84) 4546.8,12564.96 ; U1.5@4519.09,12535.55 cw(c4556.74,12527.84) 4546.8,12564.96 ; U1.5@4519.09,12535.55 cw(c4556.74,12527.84) 4546.8,12564.96 ; U1.5@4519.09,12535.55 cw(c4556.74,12527.84) 4546.8,12564.96 ; U1.5@4519.09,12535.55 cw(c4556.74,12527.84) 4546.8,12564.96 ; U1.5@4519.09,12535.55 cw(c4556.74,12527.84) 4546.8,12564.96 ; U1.5@4519.09,12535.55 cw(c4556.74,12527.84) 4546.8,12564.96 ; U1.5@4519.09,12535.55 cw(c4556.74,12527.84) 4546.8,12564.96 ; U1.5@4519.09,12535.55 cw(c4556.74,12527.84) 4546.8,12564.96 ; U1.5@4524.45,12548.98 ccw(c4524.45,12584.05) 4549.25,12559.25 ; U1.5@4524.45,12548.98 ccw(c4524.45,12584.05) 4549.25,12559.25 ; U1.5@4524.45,12548.98 ccw(c4524.45,12584.05) 4549.25,12559.25 ; U1.5@4524.45,12548.98 ccw(c4524.45,12584.05) 4549.25,12559.25 ; U1.5@4524.45,12548.98 ccw(c4524.45,12584.05) 4549.25,12559.25 ; U1.5@4524.45,12548.98 ccw(c4524.45,12584.05) 4549.25,12559.25 ; U1.5@4524.45,12558.98 ccw(c4524.45,12618.19) 4566.32,12576.32 ; U1.5@4524.45,12558.98 ccw(c4524.45,12618.19) 4566.32,12576.32 ; U1.5@4524.45,12558.98 ccw(c4524.45,12618.19) 4566.32,12576.32 ; U1.5@4524.45,12558.98 ccw(c4524.45,12618.19) 4566.32,12576.32 ; U1.5@4524.45,12558.98 ccw(c4524.45,12618.19) 4566.32,12576.32 ; U1.5@4524.45,12558.98 ccw(c4524.45,12618.19) 4566.32,12576.32 ; U1.5@4525.55,12529.09 ccw(c4517.84,12566.75) 4554.96,12556.8 ; U1.5@4525.55,12529.09 ccw(c4517.84,12566.75) 4554.96,12556.8 ; U1.5@4525.55,12529.09 ccw(c4517.84,12566.75) 4554.96,12556.8 ; U1.5@4525.55,12529.09 ccw(c4517.84,12566.75) 4554.96,12556.8 ; U1.5@4525.55,12529.09 ccw(c4517.84,12566.75) 4554.96,12556.8 ; U1.5@4525.55,12529.09 ccw(c4517.84,12566.75) 4554.96,12556.8 ; U1.5@4525.55,12529.09 ccw(c4517.84,12566.75) 4554.96,12556.8 ; U1.5@4525.55,12529.09 ccw(c4517.84,12566.75) 4554.96,12556.8 ; U1.5@4525.55,12529.09 ccw(c4517.84,12566.75) 4554.96,12556.8 ; U1.5@4525.55,12529.09 ccw(c4517.84,12566.75) 4554.96,12556.8 ; U1.5@4525.55,12529.09 ccw(c4517.84,12566.75) 4554.96,12556.8 ; U1.5@4525.55,12529.09 ccw(c4517.84,12566.75) 4554.96,12556.8 ; U1.5@4525.55,12529.09 ccw(c4517.84,12566.75) 4554.96,12556.8 ; U1.5@4525.55,12529.09 ccw(c4517.84,12566.75) 4554.96,12556.8 ; U1.5@4525.55,12529.09 ccw(c4517.84,12566.75) 4554.96,12556.8 ; U1.5@4538.98,12534.45 cw(c4574.05,12534.45) 4549.25,12559.25 ; U1.5@4538.98,12534.45 cw(c4574.05,12534.45) 4549.25,12559.25 ; U1.5@4538.98,12534.45 cw(c4574.05,12534.45) 4549.25,12559.25 ; U1.5@4538.98,12534.45 cw(c4574.05,12534.45) 4549.25,12559.25 ; U1.5@4538.98,12534.45 cw(c4574.05,12534.45) 4549.25,12559.25 ; U1.5@4538.98,12534.45 cw(c4574.05,12534.45) 4549.25,12559.25 ; U1.5@4548.98,12534.45 cw(c4608.19,12534.45) 4566.32,12576.32 ; U1.5@4548.98,12534.45 cw(c4608.19,12534.45) 4566.32,12576.32 ; U1.5@4548.98,12534.45 cw(c4608.19,12534.45) 4566.32,12576.32 ; U1.5@4548.98,12534.45 cw(c4608.19,12534.45) 4566.32,12576.32 ; U1.5@4548.98,12534.45 cw(c4608.19,12534.45) 4566.32,12576.32 ; U1.5@4548.98,12534.45 cw(c4608.19,12534.45) 4566.32,12576.32
PB9: OLED.4 U1.4 | length 4241.2
  Bottom Layer w10: U1.4@4424.45,12534.45 4429.45,12534.45 4595,12700 5002.33,12700 5003.16,12699.17 5309.17,12699.17 5880,13270 OLED.4@5880,13455 ; 4457.78,12562.78 cw(c4424.45,12596.12) U1.4@4424.45,12548.98 ; 4462.78,12567.78 ccw(c4496.12,12534.45) U1.4@4448.98,12534.45 ; 4474.86,12579.86 cw(c4424.45,12630.26) U1.4@4424.45,12558.98 ; OLED.4@5862.66,13437.66 cw(c5820.79,13395.79) 5880,13395.79 cw(c5939.21,13395.79) OLED.4@5897.34,13437.66 ; OLED.4@5869.73,13444.73 cw(c5844.93,13419.93) 5880,13419.93 cw(c5915.07,13419.93) OLED.4@5890.27,13444.73 ; U1.4@4419.09,12535.55 cw(c4456.74,12527.84) 4446.8,12564.96 ; U1.4@4419.09,12535.55 cw(c4456.74,12527.84) 4446.8,12564.96 ; U1.4@4419.09,12535.55 cw(c4456.74,12527.84) 4446.8,12564.96 ; U1.4@4419.09,12535.55 cw(c4456.74,12527.84) 4446.8,12564.96 ; U1.4@4419.09,12535.55 cw(c4456.74,12527.84) 4446.8,12564.96 ; U1.4@4419.09,12535.55 cw(c4456.74,12527.84) 4446.8,12564.96 ; U1.4@4419.09,12535.55 cw(c4456.74,12527.84) 4446.8,12564.96 ; U1.4@4419.09,12535.55 cw(c4456.74,12527.84) 4446.8,12564.96 ; U1.4@4419.09,12535.55 cw(c4456.74,12527.84) 4446.8,12564.96 ; U1.4@4419.09,12535.55 cw(c4456.74,12527.84) 4446.8,12564.96 ; U1.4@4419.09,12535.55 cw(c4456.74,12527.84) 4446.8,12564.96 ; U1.4@4419.09,12535.55 cw(c4456.74,12527.84) 4446.8,12564.96 ; U1.4@4419.09,12535.55 cw(c4456.74,12527.84) 4446.8,12564.96 ; U1.4@4419.09,12535.55 cw(c4456.74,12527.84) 4446.8,12564.96 ; U1.4@4419.09,12535.55 cw(c4456.74,12527.84) 4446.8,12564.96 ; U1.4@4424.45,12548.98 ccw(c4424.45,12584.05) 4449.25,12559.25 ; U1.4@4424.45,12548.98 ccw(c4424.45,12584.05) 4449.25,12559.25 ; U1.4@4424.45,12548.98 ccw(c4424.45,12584.05) 4449.25,12559.25 ; U1.4@4424.45,12548.98 ccw(c4424.45,12584.05) 4449.25,12559.25 ; U1.4@4424.45,12548.98 ccw(c4424.45,12584.05) 4449.25,12559.25 ; U1.4@4424.45,12558.98 ccw(c4424.45,12618.19) 4466.32,12576.32 ; U1.4@4424.45,12558.98 ccw(c4424.45,12618.19) 4466.32,12576.32 ; U1.4@4424.45,12558.98 ccw(c4424.45,12618.19) 4466.32,12576.32 ; U1.4@4424.45,12558.98 ccw(c4424.45,12618.19) 4466.32,12576.32 ; U1.4@4424.45,12558.98 ccw(c4424.45,12618.19) 4466.32,12576.32 ; U1.4@4425.55,12529.09 ccw(c4417.84,12566.75) 4454.96,12556.8 ; U1.4@4425.55,12529.09 ccw(c4417.84,12566.75) 4454.96,12556.8 ; U1.4@4425.55,12529.09 ccw(c4417.84,12566.75) 4454.96,12556.8 ; U1.4@4425.55,12529.09 ccw(c4417.84,12566.75) 4454.96,12556.8 ; U1.4@4425.55,12529.09 ccw(c4417.84,12566.75) 4454.96,12556.8 ; U1.4@4425.55,12529.09 ccw(c4417.84,12566.75) 4454.96,12556.8 ; U1.4@4425.55,12529.09 ccw(c4417.84,12566.75) 4454.96,12556.8 ; U1.4@4425.55,12529.09 ccw(c4417.84,12566.75) 4454.96,12556.8 ; U1.4@4425.55,12529.09 ccw(c4417.84,12566.75) 4454.96,12556.8 ; U1.4@4425.55,12529.09 ccw(c4417.84,12566.75) 4454.96,12556.8 ; U1.4@4425.55,12529.09 ccw(c4417.84,12566.75) 4454.96,12556.8 ; U1.4@4425.55,12529.09 ccw(c4417.84,12566.75) 4454.96,12556.8 ; U1.4@4425.55,12529.09 ccw(c4417.84,12566.75) 4454.96,12556.8 ; U1.4@4425.55,12529.09 ccw(c4417.84,12566.75) 4454.96,12556.8 ; U1.4@4425.55,12529.09 ccw(c4417.84,12566.75) 4454.96,12556.8 ; U1.4@4438.98,12534.45 cw(c4474.05,12534.45) 4449.25,12559.25 ; U1.4@4438.98,12534.45 cw(c4474.05,12534.45) 4449.25,12559.25 ; U1.4@4438.98,12534.45 cw(c4474.05,12534.45) 4449.25,12559.25 ; U1.4@4438.98,12534.45 cw(c4474.05,12534.45) 4449.25,12559.25 ; U1.4@4438.98,12534.45 cw(c4474.05,12534.45) 4449.25,12559.25 ; U1.4@4448.98,12534.45 cw(c4508.19,12534.45) 4466.32,12576.32 ; U1.4@4448.98,12534.45 cw(c4508.19,12534.45) 4466.32,12576.32 ; U1.4@4448.98,12534.45 cw(c4508.19,12534.45) 4466.32,12576.32 ; U1.4@4448.98,12534.45 cw(c4508.19,12534.45) 4466.32,12576.32 ; U1.4@4448.98,12534.45 cw(c4508.19,12534.45) 4466.32,12576.32
PB10: U2.15
PB11: U2.16
PB12: U1.20
PB13: U1.19
PB14: U1.18
PB15: U1.17
PC13: U2.2
PC14: U2.3
PC15: KEY1.2 U2.4 | length 10589.6
  Top Layer w10: U2.4@4424.45,11934.45 4424.45,12033.66 v1(4240.2,12217.91) ; KEY1.2@4948.86,10364.37 KEY1.2@5204.76,10364.37 ; v1@4240.2,12197.91 cw(c4240.2,12149.63) 4274.34,12183.77 ; v1@4240.2,12197.91 cw(c4240.2,12149.63) 4274.34,12183.77 ; v1@4240.2,12197.91 cw(c4240.2,12149.63) 4274.34,12183.77 ; v1@4240.2,12197.91 cw(c4240.2,12149.63) 4274.34,12183.77 ; v1@4240.2,12197.91 cw(c4240.2,12149.63) 4274.34,12183.77 ; v1@4240.2,12197.91 cw(c4240.2,12149.63) 4274.34,12183.77 ; v1(4240.2,12217.91) ccw(c4274.44,12224.93) 4265.39,12191.16 ; v1(4240.2,12217.91) ccw(c4274.44,12224.93) 4265.39,12191.16 ; v1(4240.2,12217.91) ccw(c4274.44,12224.93) 4265.39,12191.16 ; v1(4240.2,12217.91) ccw(c4274.44,12224.93) 4265.39,12191.16 ; v1(4240.2,12217.91) ccw(c4274.44,12224.93) 4265.39,12191.16 ; v1(4240.2,12217.91) cw(c4233.18,12183.67) 4266.95,12192.72 ; v1(4240.2,12217.91) cw(c4233.18,12183.67) 4266.95,12192.72 ; v1(4240.2,12217.91) cw(c4233.18,12183.67) 4266.95,12192.72 ; v1(4240.2,12217.91) cw(c4233.18,12183.67) 4266.95,12192.72 ; v1(4240.2,12217.91) cw(c4233.18,12183.67) 4266.95,12192.72 ; v1(4240.2,12217.91) ccw(c4274.44,12224.93) 4265.39,12191.16 ; v1(4240.2,12217.91) cw(c4233.18,12183.67) 4266.95,12192.72 ; v1(4240.2,12217.91) ccw(c4274.44,12224.93) 4265.39,12191.16 ; v1(4240.2,12217.91) ccw(c4274.44,12224.93) 4265.39,12191.16 ; v1(4240.2,12217.91) cw(c4233.18,12183.67) 4266.95,12192.72 ; v1(4240.2,12217.91) cw(c4233.18,12183.67) 4266.95,12192.72 ; v1(4240.2,12217.91) ccw(c4274.44,12224.93) 4265.39,12191.16 ; v1(4240.2,12217.91) ccw(c4274.44,12224.93) 4265.39,12191.16 ; v1(4240.2,12217.91) ccw(c4274.44,12224.93) 4265.39,12191.16 ; v1(4240.2,12217.91) cw(c4233.18,12183.67) 4266.95,12192.72 ; v1(4240.2,12217.91) cw(c4233.18,12183.67) 4266.95,12192.72 ; v1(4240.2,12217.91) cw(c4233.18,12183.67) 4266.95,12192.72 ; v1(4240.2,12217.91) ccw(c4274.44,12224.93) 4265.39,12191.16 ; v1(4240.2,12217.91) ccw(c4274.44,12224.93) 4265.39,12191.16 ; v1(4240.2,12217.91) ccw(c4274.44,12224.93) 4265.39,12191.16 ; v1(4240.2,12217.91) ccw(c4274.44,12224.93) 4265.39,12191.16 ; v1(4240.2,12217.91) cw(c4233.18,12183.67) 4266.95,12192.72 ; v1(4240.2,12217.91) cw(c4233.18,12183.67) 4266.95,12192.72 ; v1(4240.2,12217.91) cw(c4233.18,12183.67) 4266.95,12192.72 ; v1(4240.2,12217.91) cw(c4233.18,12183.67) 4266.95,12192.72 ; v1@4260.2,12217.91 ccw(c4308.48,12217.91) 4274.34,12183.77 ; v1@4260.2,12217.91 ccw(c4308.48,12217.91) 4274.34,12183.77 ; v1@4260.2,12217.91 ccw(c4308.48,12217.91) 4274.34,12183.77 ; v1@4260.2,12217.91 ccw(c4308.48,12217.91) 4274.34,12183.77 ; v1@4260.2,12217.91 ccw(c4308.48,12217.91) 4274.34,12183.77 ; v1@4260.2,12217.91 ccw(c4308.48,12217.91) 4274.34,12183.77 ; U2.4@4407.11,11951.79 ccw(c4365.23,11993.66) 4424.45,11993.66 ; U2.4@4407.11,11951.79 ccw(c4365.23,11993.66) 4424.45,11993.66 ; U2.4@4407.11,11951.79 ccw(c4365.23,11993.66) 4424.45,11993.66 ; U2.4@4407.11,11951.79 ccw(c4365.23,11993.66) 4424.45,11993.66 ; U2.4@4407.11,11951.79 ccw(c4365.23,11993.66) 4424.45,11993.66 ; U2.4@4407.11,11951.79 ccw(c4365.23,11993.66) 4424.45,11993.66 ; U2.4@4414.18,11944.72 ccw(c4389.38,11969.52) 4424.45,11969.52 ; U2.4@4414.18,11944.72 ccw(c4389.38,11969.52) 4424.45,11969.52 ; U2.4@4414.18,11944.72 ccw(c4389.38,11969.52) 4424.45,11969.52 ; U2.4@4414.18,11944.72 ccw(c4389.38,11969.52) 4424.45,11969.52 ; U2.4@4414.18,11944.72 ccw(c4389.38,11969.52) 4424.45,11969.52 ; U2.4@4414.18,11944.72 ccw(c4389.38,11969.52) 4424.45,11969.52 ; 4424.45,11969.52 ccw(c4459.52,11969.52) U2.4@4434.72,11944.72 ; 4424.45,11969.52 ccw(c4459.52,11969.52) U2.4@4434.72,11944.72 ; 4424.45,11969.52 ccw(c4459.52,11969.52) U2.4@4434.72,11944.72 ; 4424.45,11969.52 ccw(c4459.52,11969.52) U2.4@4434.72,11944.72 ; 4424.45,11969.52 ccw(c4459.52,11969.52) U2.4@4434.72,11944.72 ; 4424.45,11969.52 ccw(c4459.52,11969.52) U2.4@4434.72,11944.72 ; 4424.45,11993.66 ccw(c4483.66,11993.66) U2.4@4441.79,11951.79 ; 4424.45,11993.66 ccw(c4483.66,11993.66) U2.4@4441.79,11951.79 ; 4424.45,11993.66 ccw(c4483.66,11993.66) U2.4@4441.79,11951.79 ; 4424.45,11993.66 ccw(c4483.66,11993.66) U2.4@4441.79,11951.79 ; 4424.45,11993.66 ccw(c4483.66,11993.66) U2.4@4441.79,11951.79 ; 4424.45,11993.66 ccw(c4483.66,11993.66) U2.4@4441.79,11951.79 ; KEY1.2@4960.17,10353.06 cw(c4987.49,10325.74) 4987.49,10364.37 ; KEY1.2@4960.17,10353.06 cw(c4987.49,10325.74) 4987.49,10364.37 ; KEY1.2@4960.17,10353.06 cw(c4987.49,10325.74) 4987.49,10364.37 ; KEY1.2@4960.17,10353.06 cw(c4987.49,10325.74) 4987.49,10364.37 ; KEY1.2@4960.17,10353.06 cw(c4987.49,10325.74) 4987.49,10364.37 ; KEY1.2@4960.17,10375.68 ccw(c4987.49,10403) 4987.49,10364.37 ; KEY1.2@4960.17,10375.68 ccw(c4987.49,10403) 4987.49,10364.37 ; KEY1.2@4960.17,10375.68 ccw(c4987.49,10403) 4987.49,10364.37 ; KEY1.2@4960.17,10375.68 ccw(c4987.49,10403) 4987.49,10364.37 ; KEY1.2@4960.17,10375.68 ccw(c4987.49,10403) 4987.49,10364.37 ; KEY1.2@4967.24,10345.99 cw(c5011.63,10301.6) 5011.63,10364.37 ; KEY1.2@4967.24,10345.99 cw(c5011.63,10301.6) 5011.63,10364.37 ; KEY1.2@4967.24,10345.99 cw(c5011.63,10301.6) 5011.63,10364.37 ; KEY1.2@4967.24,10345.99 cw(c5011.63,10301.6) 5011.63,10364.37 ; KEY1.2@4967.24,10345.99 cw(c5011.63,10301.6) 5011.63,10364.37 ; KEY1.2@4967.24,10382.75 ccw(c5011.63,10427.14) 5011.63,10364.37 ; KEY1.2@4967.24,10382.75 ccw(c5011.63,10427.14) 5011.63,10364.37 ; KEY1.2@4967.24,10382.75 ccw(c5011.63,10427.14) 5011.63,10364.37 ; KEY1.2@4967.24,10382.75 ccw(c5011.63,10427.14) 5011.63,10364.37 ; KEY1.2@4967.24,10382.75 ccw(c5011.63,10427.14) 5011.63,10364.37 ; 5141.99,10364.37 cw(c5141.99,10301.6) KEY1.2@5186.38,10345.99 ; 5141.99,10364.37 ccw(c5141.99,10427.14) KEY1.2@5186.38,10382.75 ; 5141.99,10364.37 ccw(c5141.99,10427.14) KEY1.2@5186.38,10382.75 ; 5141.99,10364.37 cw(c5141.99,10301.6) KEY1.2@5186.38,10345.99 ; 5141.99,10364.37 ccw(c5141.99,10427.14) KEY1.2@5186.38,10382.75 ; 5141.99,10364.37 cw(c5141.99,10301.6) KEY1.2@5186.38,10345.99 ; 5141.99,10364.37 ccw(c5141.99,10427.14) KEY1.2@5186.38,10382.75 ; 5141.99,10364.37 cw(c5141.99,10301.6) KEY1.2@5186.38,10345.99 ; 5141.99,10364.37 ccw(c5141.99,10427.14) KEY1.2@5186.38,10382.75 ; 5141.99,10364.37 cw(c5141.99,10301.6) KEY1.2@5186.38,10345.99 ; 5166.14,10364.37 cw(c5166.14,10325.74) KEY1.2@5193.45,10353.06 ; 5166.14,10364.37 ccw(c5166.14,10403) KEY1.2@5193.45,10375.68 ; 5166.14,10364.37 ccw(c5166.14,10403) KEY1.2@5193.45,10375.68 ; 5166.14,10364.37 cw(c5166.14,10325.74) KEY1.2@5193.45,10353.06 ; 5166.14,10364.37 ccw(c5166.14,10403) KEY1.2@5193.45,10375.68 ; 5166.14,10364.37 cw(c5166.14,10325.74) KEY1.2@5193.45,10353.06 ; 5166.14,10364.37 ccw(c5166.14,10403) KEY1.2@5193.45,10375.68 ; 5166.14,10364.37 cw(c5166.14,10325.74) KEY1.2@5193.45,10353.06 ; 5166.14,10364.37 ccw(c5166.14,10403) KEY1.2@5193.45,10375.68 ; 5166.14,10364.37 cw(c5166.14,10325.74) KEY1.2@5193.45,10353.06
  Bottom Layer w10: v1(4240.2,12217.91) 3385.87,12217.91 3011.85,11843.9 3011.85,10934.45 3581.93,10364.37 KEY1.2@4948.86,10364.37 ; 4191.91,12217.91 cw(c4191.91,12169.63) v1@4226.05,12203.77 ; 4191.91,12217.91 ccw(c4191.91,12266.2) v1@4226.05,12232.06 ; 4191.91,12217.91 ccw(c4191.91,12266.2) v1@4226.05,12232.06 ; 4191.91,12217.91 cw(c4191.91,12169.63) v1@4226.05,12203.77 ; 4191.91,12217.91 ccw(c4191.91,12266.2) v1@4226.05,12232.06 ; 4191.91,12217.91 cw(c4191.91,12169.63) v1@4226.05,12203.77 ; 4191.91,12217.91 ccw(c4191.91,12266.2) v1@4226.05,12232.06 ; 4191.91,12217.91 cw(c4191.91,12169.63) v1@4226.05,12203.77 ; 4191.91,12217.91 ccw(c4191.91,12266.2) v1@4226.05,12232.06 ; 4191.91,12217.91 cw(c4191.91,12169.63) v1@4226.05,12203.77 ; 4191.91,12217.91 ccw(c4191.91,12266.2) v1@4226.05,12232.06 ; 4191.91,12217.91 cw(c4191.91,12169.63) v1@4226.05,12203.77 ; 4886.09,10364.37 cw(c4886.09,10301.6) KEY1.2@4930.47,10345.99 ; 4886.09,10364.37 ccw(c4886.09,10427.14) KEY1.2@4930.47,10382.75 ; 4886.09,10364.37 ccw(c4886.09,10427.14) KEY1.2@4930.47,10382.75 ; 4886.09,10364.37 cw(c4886.09,10301.6) KEY1.2@4930.47,10345.99 ; 4886.09,10364.37 ccw(c4886.09,10427.14) KEY1.2@4930.47,10382.75 ; 4886.09,10364.37 cw(c4886.09,10301.6) KEY1.2@4930.47,10345.99 ; 4886.09,10364.37 ccw(c4886.09,10427.14) KEY1.2@4930.47,10382.75 ; 4886.09,10364.37 cw(c4886.09,10301.6) KEY1.2@4930.47,10345.99 ; 4886.09,10364.37 ccw(c4886.09,10427.14) KEY1.2@4930.47,10382.75 ; 4886.09,10364.37 cw(c4886.09,10301.6) KEY1.2@4930.47,10345.99 ; 4886.09,10364.37 ccw(c4886.09,10427.14) KEY1.2@4930.47,10382.75 ; 4886.09,10364.37 cw(c4886.09,10301.6) KEY1.2@4930.47,10345.99 ; 4910.23,10364.37 cw(c4910.23,10325.74) KEY1.2@4937.54,10353.06 ; 4910.23,10364.37 ccw(c4910.23,10403) KEY1.2@4937.54,10375.68 ; 4910.23,10364.37 ccw(c4910.23,10403) KEY1.2@4937.54,10375.68 ; 4910.23,10364.37 cw(c4910.23,10325.74) KEY1.2@4937.54,10353.06 ; 4910.23,10364.37 ccw(c4910.23,10403) KEY1.2@4937.54,10375.68 ; 4910.23,10364.37 cw(c4910.23,10325.74) KEY1.2@4937.54,10353.06 ; 4910.23,10364.37 ccw(c4910.23,10403) KEY1.2@4937.54,10375.68 ; 4910.23,10364.37 cw(c4910.23,10325.74) KEY1.2@4937.54,10353.06 ; 4910.23,10364.37 ccw(c4910.23,10403) KEY1.2@4937.54,10375.68 ; 4910.23,10364.37 cw(c4910.23,10325.74) KEY1.2@4937.54,10353.06 ; 4910.23,10364.37 ccw(c4910.23,10403) KEY1.2@4937.54,10375.68 ; 4910.23,10364.37 cw(c4910.23,10325.74) KEY1.2@4937.54,10353.06
pads on no net: J1.0 J2.0 K1.1 K1.2 K1.3 K1.4 U2.1

## Polygon pours and split planes (outlines as drawn)
GND on Bottom Layer "Top Layer-GND" (solid, remove dead copper, pour order 4): 2930,14130 6775,14130 6775,10285 2925,10285 2925,14130
GND on Top Layer "Top Layer-GND" (solid, remove dead copper, pour order 6): 2925,10285 6775,10285 6775,14130 2925,14130

## Keep-outs
Keep-Out Layer:
  lines w10: 2881.93,10320.28 ccw(c2960.67,10316.34) 2956.73,10237.6 ; 2881.93,14080.12 cw(c2966.57,14089.96) 2956.73,14174.61 ; 6736.26,10237.6 ccw(c6726.42,10330.12) 6818.94,10339.96 ; 6736.26,14174.61 cw(c6740.2,14095.87) 6818.94,14099.8

## Silkscreen, mask and mechanical layers (free items; w line width, h text height)
Top Overlay:
  lines w10: 4425.24,13560.43 4425.24,13753.35 ; 4502.01,13676.57 4425.24,13753.35 ; 4350.43,13678.54 4425.24,13753.35 ; 4350.43,13678.54 4350.43,13678.54 ; 4350.43,13678.54 4425.24,13753.35
  text "3.3v" at 5300,13425 h50
  text "-" at 3322.87,13316.34 h60
  text "+5V" at 3255.94,13217.91 h50
  text "3.3v" at 4074.84,12631.3 h50
  text "+5v" at 6500.04,12517.13 h50
  text "-" at 6003.98,11784.84 h80
  text "3.3v" at 5752.01,11776.97 h50
  text "3.3v" at 3350.43,11765.16 h50
  text "-" at 3551.22,11757.28 h80
  text "By Dj140" at 6027.6,10359.65 h50
Mechanical 1:
  lines w10: 2881.93,10312.4 2881.93,14103.74 ; 2952.8,14174.61 6748.07,14174.61 ; 2956.73,10237.6 6736.26,10237.6 ; 6818.94,10320.28 6818.94,14103.74